# EAGLE board Nucleo-F042K6 - mj8x8 gateway- rev.1 - TCAN334 - poc (EAGLE 9.6.2)
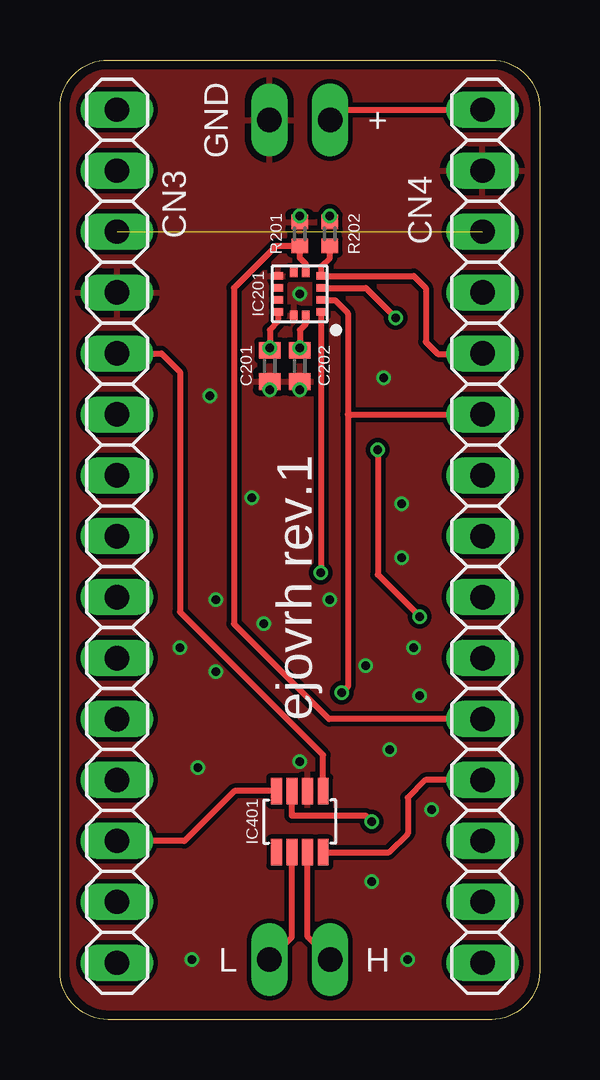
[diagram p0: board, top side]
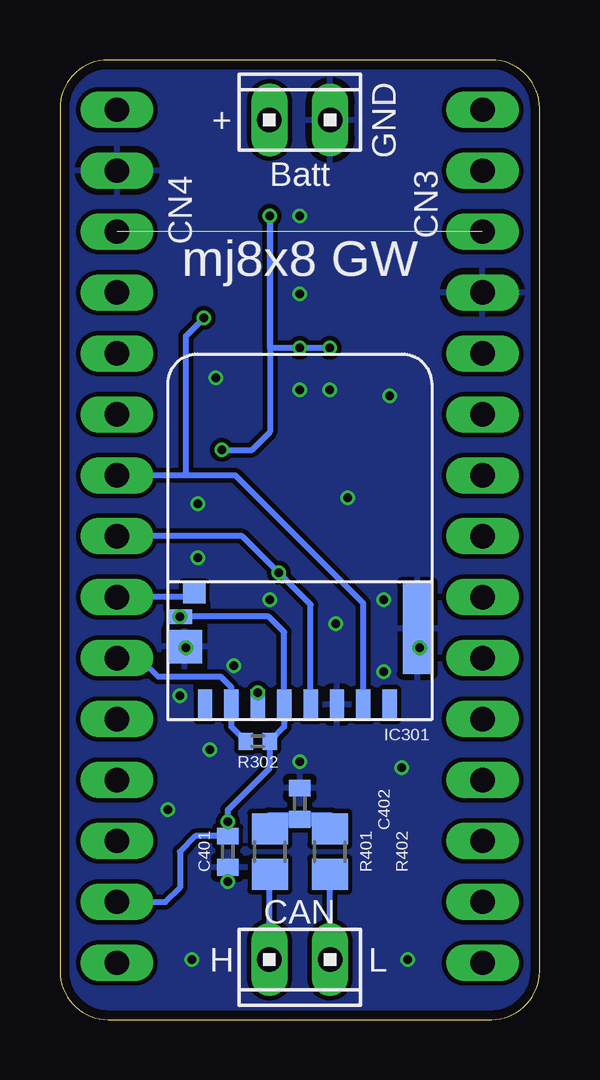
[diagram p1: board, bottom side, seen from below]

Size 20 x 40 mm. Coordinates in mm from the lower left corner, seen from the top.
Outline: 18,0 2,0 arc-90 0,2 0,38 arc-90 2,40 18,40 arc-90 20,38 20,2 arc-90 18,0
Copper layers (1*16): Top 0.035559375mm / dielectric 1.6mm / Bottom 0.035559375mm
Design rules "oshpark-2layer": minimum track width 6mil, minimum drill 10mil, track to track 6mil, track to pad 6mil, pad to pad 6mil, via to via 6mil, smd to smd 6mil, copper to edge 15mil, drill to drill 6mil, minimum pad ring 5mil, minimum via ring 5mil, stop-mask expansion 2.5mil, vias tented up to drill 0mil, thermal gap 10mil
Net classes: 0 GND: width 0.25 mm, drill 0.35 mm, clearance 0.19 mm; 3 signal: width 0.25 mm, drill 0.35 mm, clearance 0.19 mm; 4 3V3: width 0.25 mm, drill 0.35 mm, clearance 0.19 mm

## Footprints (pad centres in the part's own frame; a part is rotated, then mirrored left to right if it is on the bottom)
C0402 = smd 0.7 x 0.9: 1 -0.65,0; 2 0.65,0
LGA = smd 0.39 x 0.33: 1 -0.9,0.75; 2 -0.9,0.25; 3 -0.9,-0.25; 4 -0.9,-0.75; 7 0.9,-0.75; 8 0.9,-0.25; 9 0.9,0.25; 10 0.9,0.75 | smd 0.33 x 0.39: 5 -0.25,-0.9; 6 0.25,-0.9; 11 0.25,0.9; 12 -0.25,0.9
MICRO_SD_CONNECTOR = smd 1.2 x 3.79: G1 0.6,-3.81 | smd 1.45 x 1.4: G2 10.3,-3.05 | smd 1 x 0.6: G3 10.5,-4.3 | smd 0.95 x 0.85: G4 9.9,-5.27 | smd 0.6 x 1.25: PIN1 9.45,-0.63; PIN2 8.35,-0.63; PIN3 7.25,-0.63; PIN4 6.15,-0.63; PIN5 5.05,-0.63; PIN6 3.95,-0.63; PIN7 2.85,-0.63; PIN8 1.75,-0.63
SOT23-8 = smd 0.45 x 1.1: P$1 -0.975,-1.275; P$2 -0.325,-1.275; P$3 0.325,-1.275; P$4 0.975,-1.275; P$5 0.975,1.275; P$6 0.325,1.275; P$7 -0.325,1.275; P$8 -0.975,1.275
10X02MTA = drill 1.016 long: 1 1.27,0; 2 -1.27,0
1X15 = drill 1.016 long: 1 -17.78,0; 2 -15.24,0; 3 -12.7,0; 4 -10.16,0; 5 -7.62,0; 6 -5.08,0; 7 -2.54,0; 8 0,0; 9 2.54,0; 10 5.08,0; 11 7.62,0; 12 10.16,0; 13 12.7,0; 14 15.24,0; 15 17.78,0
R0402 = smd 0.6 x 0.7: 1 -0.5,0; 2 0.5,0
R0805 = smd 1.3 x 1.5: 1 -0.95,0; 2 0.95,0

## Placement (x,y rotation side)
C201  0.1u  [C0402]  8.75,27.25 270 top
C202  0.1u  [C0402]  10,27.25 270 top
C401  0.1uF / 10V  [C0402]  13,7 270 bottom
C402  47nF / 10V  [C0402]  10,9 90 bottom
IC201  ADXL367  [LGA]  10,30.25 180 top
IC301  47309-2651  [MICRO_SD_CONNECTOR]  4.5,12.5 180 bottom
IC401  TCAN334  [SOT23-8]  10,8.25 180 top
J1  Batt  [10X02MTA]  10,37.5 0 bottom
J2  Batt  [10X02MTA]  10,2.5 180 bottom
JP1  CN3  [1X15]  2.38,20.15 270 top
JP2  CN4  [1X15]  17.62,20.15 270 top
R201  10k  [R0402]  10,32.75 270 top
R202  10k  [R0402]  11.25,32.75 90 top
R302  10k  [R0402]  11.75,11.6 0 bottom
R401  60  [R0805]  11.25,7 270 bottom
R402  60  [R0805]  8.75,7 90 bottom

## Library data of the parts
C201 C202 C401 C402 = rcl; SPICEPREFIX: C
IC201 = ADXL 367 - Accelerometer
IC301 = Molex SD-47309 SD Card Slot
IC401 = TCAN33x - 3.3V CAN Transciever
J1 J2 = con-amp
JP1 JP2 = pinhead
R201 R202 R302 R401 R402 = rcl; SPICEPREFIX: R

## Nets
3V3 [3V3]: C201.1 C202.1 C401.1 IC201.10 IC201.12 IC301.G3 IC301.PIN4 IC401.P$3 JP2.14 R202.2 R302.2
5V0: JP2.4
!STBY! [signal]: IC401.P$8 JP2.12
ADXL367:9_VREG: IC201.9
ADXL367_CS: IC201.4 JP2.5 R202.1
ADXL367_INT1: IC201.5 JP2.11 R201.2
AREF: JP2.13
CAN_INFRA:SPLIT [signal]: C402.1 R401.1 R402.2
CANH: IC401.P$7 J2.1 R401.2
CANL: IC401.P$6 J2.2 R402.1
CLK: IC201.1 IC301.PIN5 JP2.8
GND: C201.2 C202.2 C401.2 C402.2 IC201.7 IC201.11 IC301.G1 IC301.G2 IC301.PIN6 IC401.P$2 J1.1 JP1.4 JP2.2 R201.1
MISO: IC201.3 IC301.PIN7 JP2.7
MOSI: IC201.2 IC301.PIN3 JP2.6
PA8 [signal]: JP1.12
PA9: JP1.1
PA10: JP1.2
PB0: JP1.6
PB1: JP1.9
PB4: JP1.15
PB5: JP1.14
PB6: JP1.8
PB7: JP1.7
PF0: JP1.10
PF1: JP1.11
RST: JP1.3 JP2.3
RXCAN [signal]: IC401.P$4 JP1.13
SD_CS: IC301.PIN2 JP2.10 R302.1
SD_DET: IC301.G4 JP2.9
TXCAN [signal]: IC401.P$1 JP1.5
VIN [3V3]: J1.2 JP2.1

## Tracks (layer width: path | path; a pad name or v marks a point on that pad's centre or on a via)
3V3  (via drill 0.35)
  Top 0.25: v13,8.25 12.75,8.5 9.68,8.5 IC401.P$3 | IC201.12 10.25,29 10,28.75 v10,28 C202.1 | v13.25,23.75 13.25,18.55 IC301.G3 | IC201.10 9.1,29.1 8.75,28.75 v8.75,28 C201.1 | R202.2 v11.25,33.5
  Bottom 0.25: JP2.14 15.59,4.91 15,5.5 15,7 14.35,7.65 C401.1 v13,8.25 13,8.75 11.25,10.5 R302.2 10.65,12.2 IC301.PIN4 10.65,16.15 11.3,16.8 IC301.G3 | v8.75,28 v10,28 11.25,28 v11.25,33.5 11.25,24.5 12,23.75 v13.25,23.75
  other vias: 15,16.8
!STBY!
  Top 0.25: IC401.P$8 13.72,6.97 14.5,7.75 14.5,9.25 15.24,9.99 JP2.12
ADXL367_CS
  Top 0.25: R202.1 11.25,31.75 10.9,31.4 IC201.4 14.75,31 15.25,30.5 15.25,28.25 15.75,27.75 17.6,27.75 JP2.5
ADXL367_INT1
  Top 0.25: JP2.11 11.22,12.53 7.25,16.5 7.25,30.5 9,32.25 R201.2 10,31.75 10.25,31.5 IC201.5
CAN_INFRA:SPLIT
  Bottom 0.25: R402.2 8.75,8.35 | R401.1 11.25,8.35
  Bottom 0.61: 8.75,8.35 C402.1 11.25,8.35
CANH
  Top 0.25: J2.1 10.32,3.45 IC401.P$7
  Bottom 0.25: J2.1 11.27,6.03 R401.2
CANL
  Top 0.25: J2.2 9.68,3.45 IC401.P$6
  Bottom 0.25: J2.2 8.73,6.03 R402.1
CLK  (via drill 0.35)
  Top 0.25: IC201.1 10.88,29.48 v10.88,18.62
  Bottom 0.25: IC301.PIN5 9.55,17.3 v10.88,18.62 12.4,20.15 JP2.8
GND  (via drill 0.35)
  other vias: 10,10.75 14.75,15.5 5,15.5 13,5.75 6.5,14.5 8.5,16.5 12.75,14.75 11.25,17.5 14.25,19.25 14.25,21.5 6.5,17.5 10,30.25 8.75,26.25 10,26.25 13.75,11.25 5.5,2.5 14.5,2.5 6.25,26 13.5,26.75 8,21.75 5.75,10.5 15.5,8.75 15,13.5 10,33.5
  pour Top: 0,0 20,0 20,40 0,40
  pour Bottom: 0,0 20,0 20,40 0,40
MISO  (via drill 0.35)
  Top 0.25: v14,29.25 12.75,30.5 IC201.3
  Bottom 0.25: IC301.PIN7 7.35,17.35 12.69,22.69 14.75,22.69 | 14.75,22.69 JP2.7 | 14.75,22.69 14.75,28.5 v14,29.25
MOSI  (via drill 0.35)
  Top 0.25: 12,25.23 12,13.88 v11.75,13.63 | 12,25.23 JP2.6 | IC201.2 10.92,29.98 11.47,29.98 12,29.45 12,25.23
  Bottom 0.25: IC301.PIN3 v11.75,13.63
RST  (1 unrouted)
RXCAN
  Top 0.25: IC401.P$4 7.28,9.53 5.2,7.45 JP1.13
SD_CS
  Bottom 0.25: R302.1 12.85,12.2 IC301.PIN2 12.85,13.85 13.29,14.29 15.91,14.29 16.69,15.07 JP2.10
SD_DET
  Bottom 0.25: IC301.G4 14.56,17.61 JP2.9
TXCAN
  Top 0.25: IC401.P$1 10.97,11.02 5,17 5,27 4.23,27.77 JP1.5
VIN
  Top 0.25: J1.2 11.7,37.93 JP2.1

## Text on the board
tPlace: GND | + | CN3 | CN4 | ejovrh rev.1 | L | H
bPlace: GND | + | Batt | CN3 | CN4 | mj8x8 GW | CAN | L | H